# EAGLE board AkPlat2 (EAGLE 9.6.2)
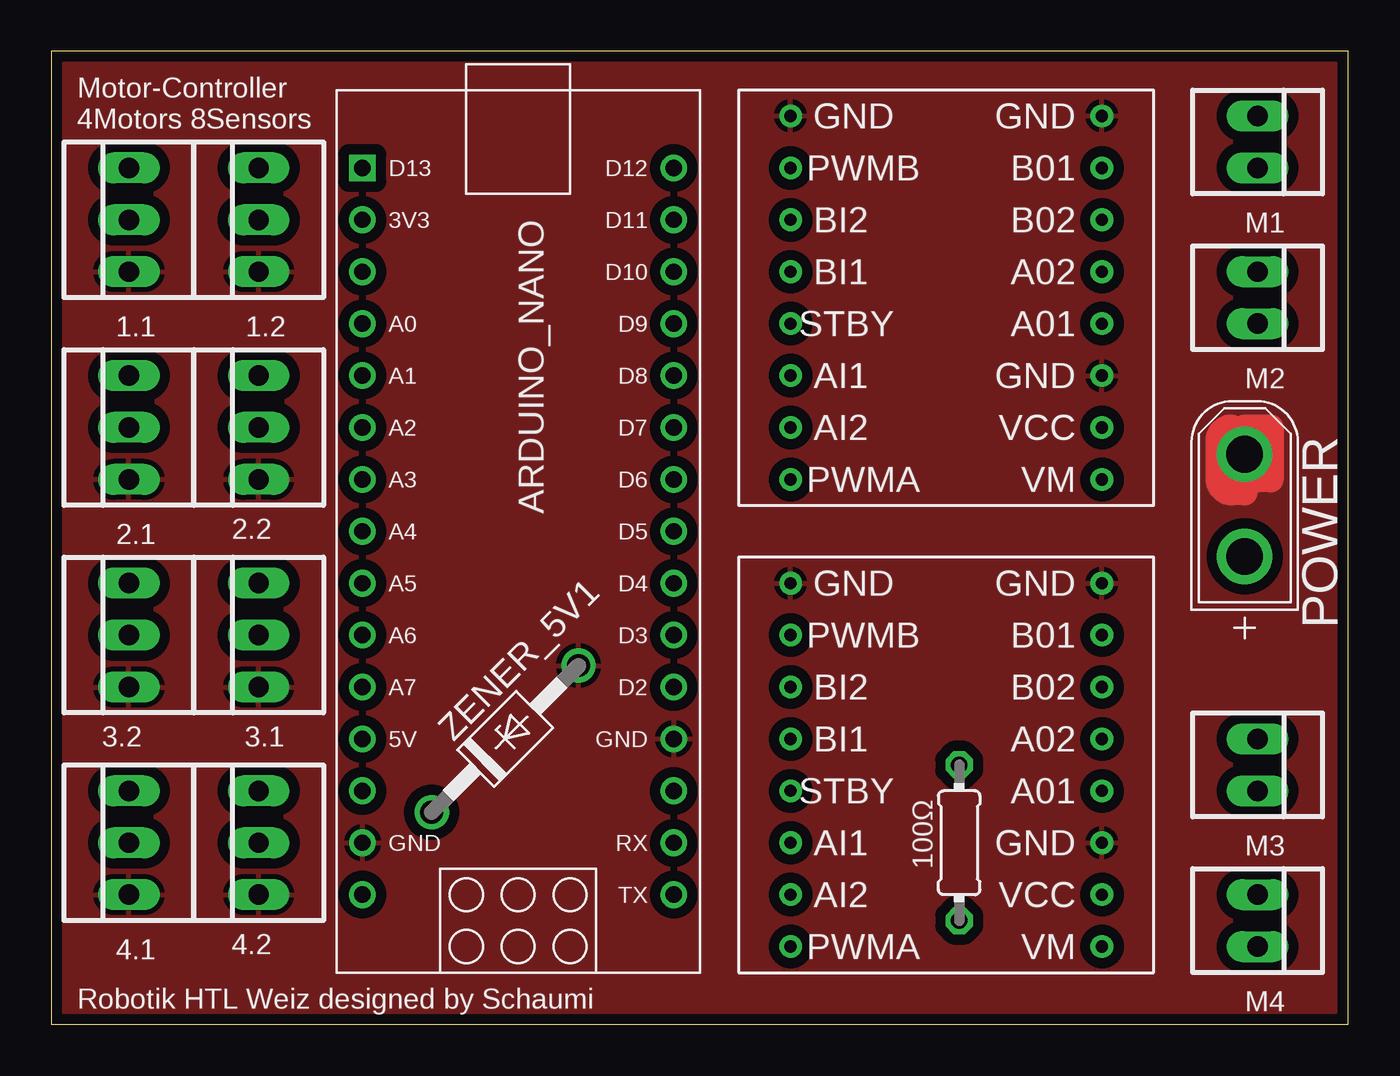
[diagram p0: board, top side]
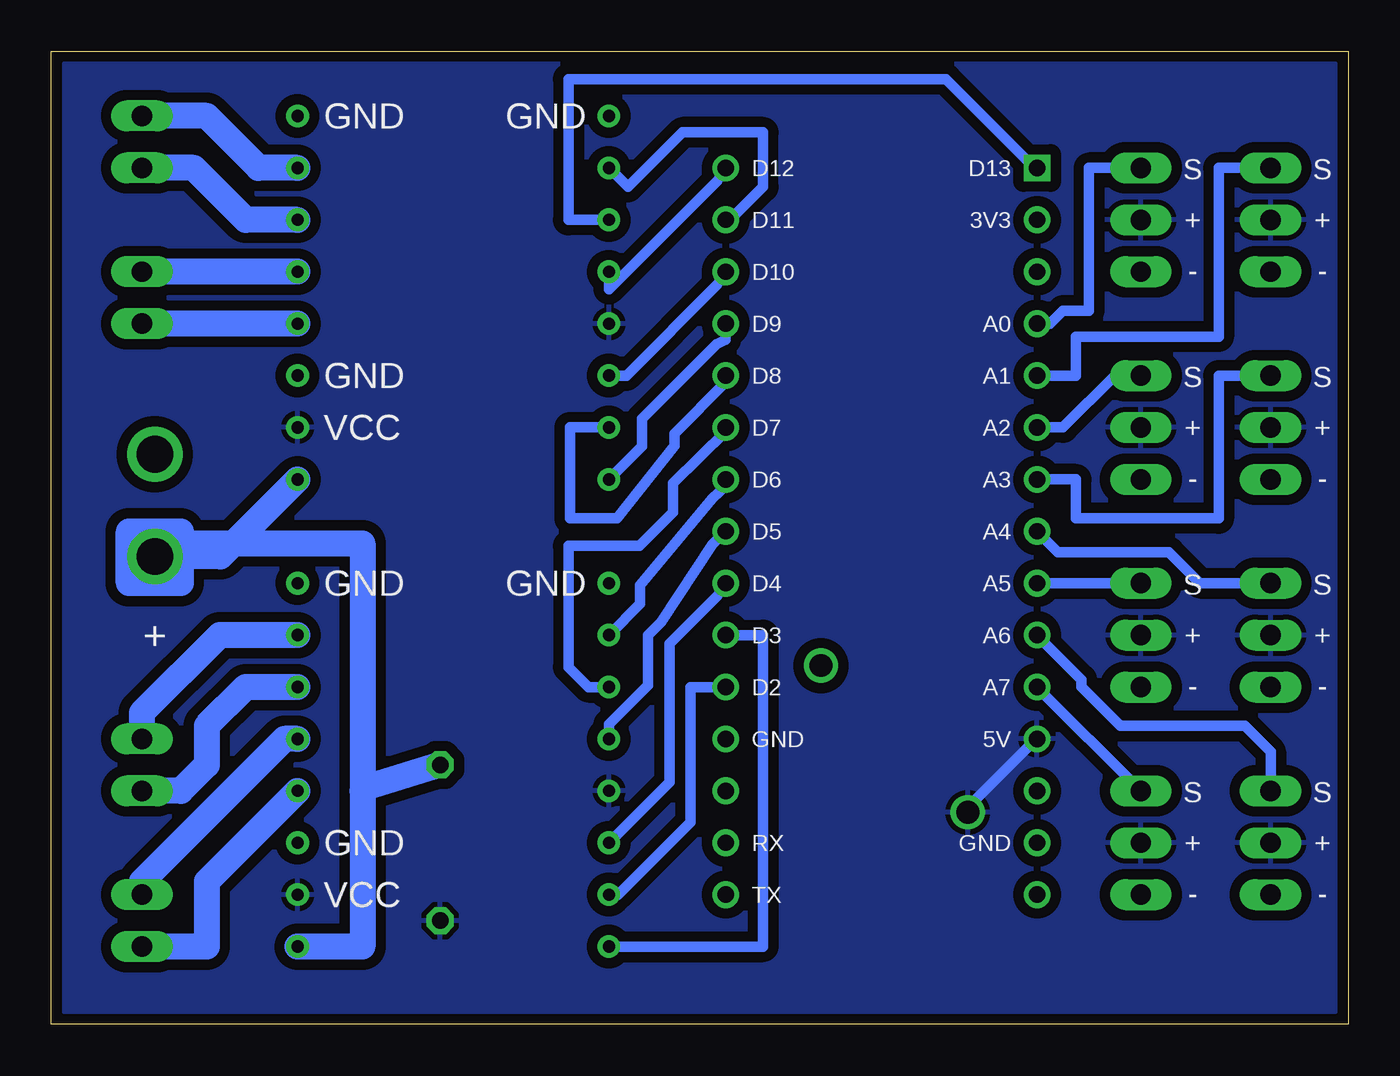
[diagram p1: board, bottom side, seen from below]

Size 63.5 x 47.62 mm. Coordinates in mm from the lower left corner, seen from the top.
Outline: 0,0 63.5,0 63.5,47.62 0,47.62 0,0
Copper layers (1*16): Top 0.035mm / dielectric 1.5mm / Bottom 0.035mm
Design rules "default *": minimum track width 20mil, minimum drill 0.35mm, track to track 20mil, track to pad 20mil, pad to pad 6mil, via to via 6mil, smd to smd 6mil, copper to edge 0mil, drill to drill 6mil, minimum pad ring 10mil, minimum via ring 8mil, stop-mask expansion 4mil, vias tented up to drill 0mil, thermal gap 10mil

## Footprints (pad centres in the part's own frame; a part is rotated, then mirrored left to right if it is on the bottom)
22-23-2031 = drill 1 long: 1 -2.54,0; 2 0,0; 3 2.54,0
0204/7 = drill 0.813 octagon: 1 -3.81,0; 2 3.81,0
ARDUINO_NANO = drill 0.8 square: 1 -20.32,-7.62 | drill 0.8: 2 -17.78,-7.62; 3 -15.24,-7.62; 4 -12.7,-7.62; 5 -10.16,-7.62; 6 -7.62,-7.62; 7 -5.08,-7.62; 8 -2.54,-7.62; 9 0,-7.62; 10 2.54,-7.62; 11 5.08,-7.62; 12 7.62,-7.62; 13 10.16,-7.62; 14 12.7,-7.62; 15 15.24,-7.62; 16 15.24,7.62; 17 12.7,7.62; 18 10.16,7.62; 19 7.62,7.62; 20 5.08,7.62; 21 2.54,7.62; 22 0,7.62; 23 -2.54,7.62; 24 -5.08,7.62; 25 -7.62,7.62; 26 -10.16,7.62; 27 -12.7,7.62; 28 -15.24,7.62; 29 -17.78,7.62; 30 -20.32,7.62
22-23-2021 = drill 1 long: 1 -1.27,0; 2 1.27,0
XT30UPB-M = drill 1.8: + 2.5,0; - -2.5,0
CONTROLLER = drill 0.6: 1 2.54,1.27; 2 2.54,3.81; 3 2.54,6.35; 4 2.54,8.89; 5 2.54,11.43; 6 2.54,13.97; 7 2.54,16.51; 8 2.54,19.05; 9 17.78,1.27; 10 17.78,3.81; 11 17.78,6.35; 12 17.78,8.89; 13 17.78,11.43; 14 17.78,13.97; 15 17.78,16.51; 16 17.78,19.05
DO41Z10 = drill 1.118: A 5.08,0; C -5.08,0

## Placement (x,y rotation side)
1.1  22-23-2031  [22-23-2031]  3.81,39.37 90 top
1.2  22-23-2031  [22-23-2031]  10.16,39.37 90 top
2.1  22-23-2031  [22-23-2031]  3.81,29.21 90 top
2.2  22-23-2031  [22-23-2031]  10.16,29.21 90 top
3.1  22-23-2031  [22-23-2031]  10.16,19.05 90 top
3.2  22-23-2031  [22-23-2031]  3.81,19.05 90 top
4.1  22-23-2031  [22-23-2031]  3.81,8.89 90 top
4.2  22-23-2031  [22-23-2031]  10.16,8.89 90 top
100Ω  100  [0204/7]  44.45,8.89 90 top
ARDUINO_NANO  [ARDUINO_NANO]  22.86,21.59 270 top
M1  22-23-2021  [22-23-2021]  59.05,43.18 270 top
M2  22-23-2021  [22-23-2021]  59.05,35.56 270 top
M3  22-23-2021  [22-23-2021]  59.05,12.7 270 top
M4  22-23-2021  [22-23-2021]  59.05,5.08 270 top
POWER  XT30UPB-M  [XT30UPB-M]  58.42,25.4 270 top
U$1  CONTROLLER  [CONTROLLER]  53.98,45.72 180 top
U$2  CONTROLLER  [CONTROLLER]  53.98,22.86 180 top
ZENER_5V1  BZX85  [DO41Z10]  22.23,13.97 45 top

## Library data of the parts
1.1 1.2 2.1 2.2 3.1 3.2 4.1 4.2 = con-molex; MF: MOLEX; MPN: 22-23-2031; OC_FARNELL: 1462950; OC_NEWARK: 30C0862
100Ω = rcl; SPICEPREFIX: R
ARDUINO_NANO = ArduinoNanoV30
M1-M4 = con-molex; MF: MOLEX; MPN: 22-23-2021; OC_FARNELL: 1462926; OC_NEWARK: 25C3832
POWER = amass
U$1 U$2 = Motorcontroller
ZENER_5V1 = diode

## Nets
5V: 1.1.2 1.2.2 2.1.2 2.2.2 3.1.2 3.2.2 4.1.2 4.2.2 100Ω.1 ARDUINO_NANO.12 U$1.7 U$1.13 U$2.7 U$2.13 ZENER_5V1.C
BIN2: ARDUINO_NANO.1 U$1.11
GND: 1.1.1 1.2.1 2.1.1 2.2.1 3.1.1 3.2.1 4.1.1 4.2.1 ARDUINO_NANO.14 ARDUINO_NANO.19 POWER.- U$1.1 U$1.6 U$1.9 U$2.1 U$2.6 U$2.9 ZENER_5V1.A
N$3: ARDUINO_NANO.27 U$1.16
N$4: ARDUINO_NANO.25 U$2.11
N$5: ARDUINO_NANO.30 U$1.12
N$6: ARDUINO_NANO.29 U$1.10
N$7: ARDUINO_NANO.28 U$1.14
N$9: ARDUINO_NANO.26 U$1.15
N$10: ARDUINO_NANO.24 U$2.10
N$11: ARDUINO_NANO.21 U$2.16
N$12: ARDUINO_NANO.20 U$2.15
N$13: ARDUINO_NANO.22 U$2.14
N$14: ARDUINO_NANO.23 U$2.12
N$16: M1.1 U$1.2
N$17: M1.2 U$1.3
N$18: M2.1 U$1.4
N$19: M2.2 U$1.5
N$20: M3.1 U$2.2
N$21: M3.2 U$2.3
N$22: M4.1 U$2.4
N$23: M4.2 U$2.5
N$26: 4.2.3 ARDUINO_NANO.11
N$27: 4.1.3 ARDUINO_NANO.10
N$30: 3.1.3 ARDUINO_NANO.9
N$31: 3.2.3 ARDUINO_NANO.8
N$32: 2.1.3 ARDUINO_NANO.7
N$33: 2.2.3 ARDUINO_NANO.6
N$34: 1.1.3 ARDUINO_NANO.5
N$35: 1.2.3 ARDUINO_NANO.4
VIN: ARDUINO_NANO.15
VM: 100Ω.2 POWER.+ U$1.8 U$2.8

## Tracks (layer width: path | path; a pad name or v marks a point on that pad's centre or on a via)
5V
  Bottom 0.508: ARDUINO_NANO.12 15.58,13.63 15.7,13.55 18.63,10.62 ZENER_5V1.C
  pour Bottom (isolate 0.406): 0.64,46.99 62.87,46.99 62.87,0.64 0.64,0.64
BIN2
  Bottom 0.508: U$1.11 38.18,39.37 38.18,46.25 19.7,46.25 15.58,42.14 ARDUINO_NANO.1
GND
  Top 1.27: POWER.- 58.42,29.21 59.69,29.21 59.69,26.67 59.05,26.67 arc90 58.42,26.04 57.78,26.04 arc-90 57.15,26.67 57.15,28.57 arc-90 57.78,29.21
  pour Top (isolate 0.406): 0.64,46.99 0.64,0.64 62.87,0.64 62.87,46.99
N$3
  Bottom 0.508: U$1.16 34.58,28.28 34.58,29.63 30.93,33.28 30.48,33.51 ARDUINO_NANO.27
N$4
  Bottom 0.508: ARDUINO_NANO.25 30.44,29.17 30.44,29.06 33.07,26.48 33.07,25.06 34.71,23.42 38.18,23.42 38.18,17.49 37.2,16.51 U$2.11
N$5
  Bottom 0.508: U$1.12 36.2,35.98 30.91,41.26 ARDUINO_NANO.30
N$6
  Bottom 0.508: U$1.10 35.26,40.98 32.59,43.65 28.65,43.65 28.65,40.98 30.05,39.59 ARDUINO_NANO.29
N$7
  Bottom 0.508: U$1.14 35.34,31.75 30.91,36.18 ARDUINO_NANO.28
N$9
  Bottom 0.508: ARDUINO_NANO.26 30.48,31.42 32.99,28.91 32.99,28.3 35.8,24.77 38.1,24.77 38.1,29.21 U$1.15
N$10
  Bottom 0.508: U$2.10 34.66,20.58 34.66,21.49 31.13,25.74 30.48,26.33 ARDUINO_NANO.24
N$11
  Bottom 0.508: U$2.16 28.65,3.81 28.65,19.05 ARDUINO_NANO.21
N$12
  Bottom 0.508: U$2.15 35.76,6.35 32.21,9.9 32.21,16.47 32.18,16.5 32.2,16.51 ARDUINO_NANO.20
N$13
  Bottom 0.508: U$2.14 33.22,11.86 33.22,18.63 30.91,20.94 ARDUINO_NANO.22
N$14
  Bottom 0.508: U$2.12 36.2,14.68 34.29,16.59 34.29,19.05 33.66,19.68 31.11,23.5 ARDUINO_NANO.23
N$16
  Bottom 1.27: U$1.2 53.34,41.91 55.88,44.45 M1.1
N$17
  Bottom 1.27: U$1.3 53.98,39.37 56.52,41.91 M1.2
N$18
  Bottom 1.27: U$1.4 M2.1
N$19
  Bottom 1.27: U$1.5 M2.2
N$20
  Bottom 1.27: U$2.2 55.24,19.05 59.05,15.24 M3.1
N$21
  Bottom 1.27: U$2.3 53.98,16.51 55.88,14.61 55.88,12.7 57.15,11.43 M3.2
N$22
  Bottom 1.27: U$2.4 52.07,13.97 59.05,6.99 M4.1
N$23
  Bottom 1.27: U$2.5 55.88,6.99 55.88,3.81 M4.2
N$26
  Bottom 0.508: ARDUINO_NANO.11 4.2.3
N$27
  Bottom 0.508: ARDUINO_NANO.10 13.06,16.88 13.06,16.52 11.15,14.61 10.16,14.61 5.08,14.61 3.81,13.34 4.1.3
N$30
  Bottom 0.508: ARDUINO_NANO.9 3.1.3
N$31
  Bottom 0.508: 3.2.3 7.26,21.59 8.78,23.11 14.22,23.11 ARDUINO_NANO.8
N$32
  Bottom 0.508: 2.1.3 6.35,31.75 6.35,24.77 10.16,24.77 13.34,24.77 13.34,26.67 ARDUINO_NANO.7
N$33
  Bottom 0.508: 2.2.3 11.43,31.75 13.97,29.21 ARDUINO_NANO.6
N$34
  Bottom 0.508: 1.1.3 6.35,41.91 6.35,33.66 13.34,33.66 13.34,31.75 ARDUINO_NANO.5
N$35
  Bottom 0.508: 1.2.3 12.7,41.91 12.7,34.92 13.97,34.92 14.61,34.29 ARDUINO_NANO.4
VM
  Bottom 1.27: U$1.8 55.2,22.9 57.15,22.9 | 57.15,22.9 POWER.+ 57.78,23.54 48.26,23.54 48.26,11.43 | U$2.8 48.26,3.81 48.26,11.43 | 57.15,22.9 57.15,21.59 59.69,21.59 59.69,24.13 57.15,24.13 | 100Ω.2 48.11,11.58 48.26,11.43

## Text on the board
tPlace: Motor-Controller / 4Motors 8Sensors | Robotik HTL Weiz designed by Schaumi
bPlace: GND | GND | S / / + / / - | S / / + / / - | GND | S / / + / / - | S / / + / / - | VCC | GND | GND | S / / + / / - | S / / + / / - | + | S / / + / / - | S / / + / / - | GND | VCC